# Altium PCB AC-Power-Monitor.PcbDoc (part 2 of 3)
Units mm, origin at the board's own origin, x right, y up, seen from the top; angles counter-clockwise.
Board outline 94 x 57 mm, 4 copper layers (Top Layer, N / GND, L / VCC, Bottom Layer), stack 0.673 mm thick; 70 components, 59 nets, 252 pads, 596 vias.
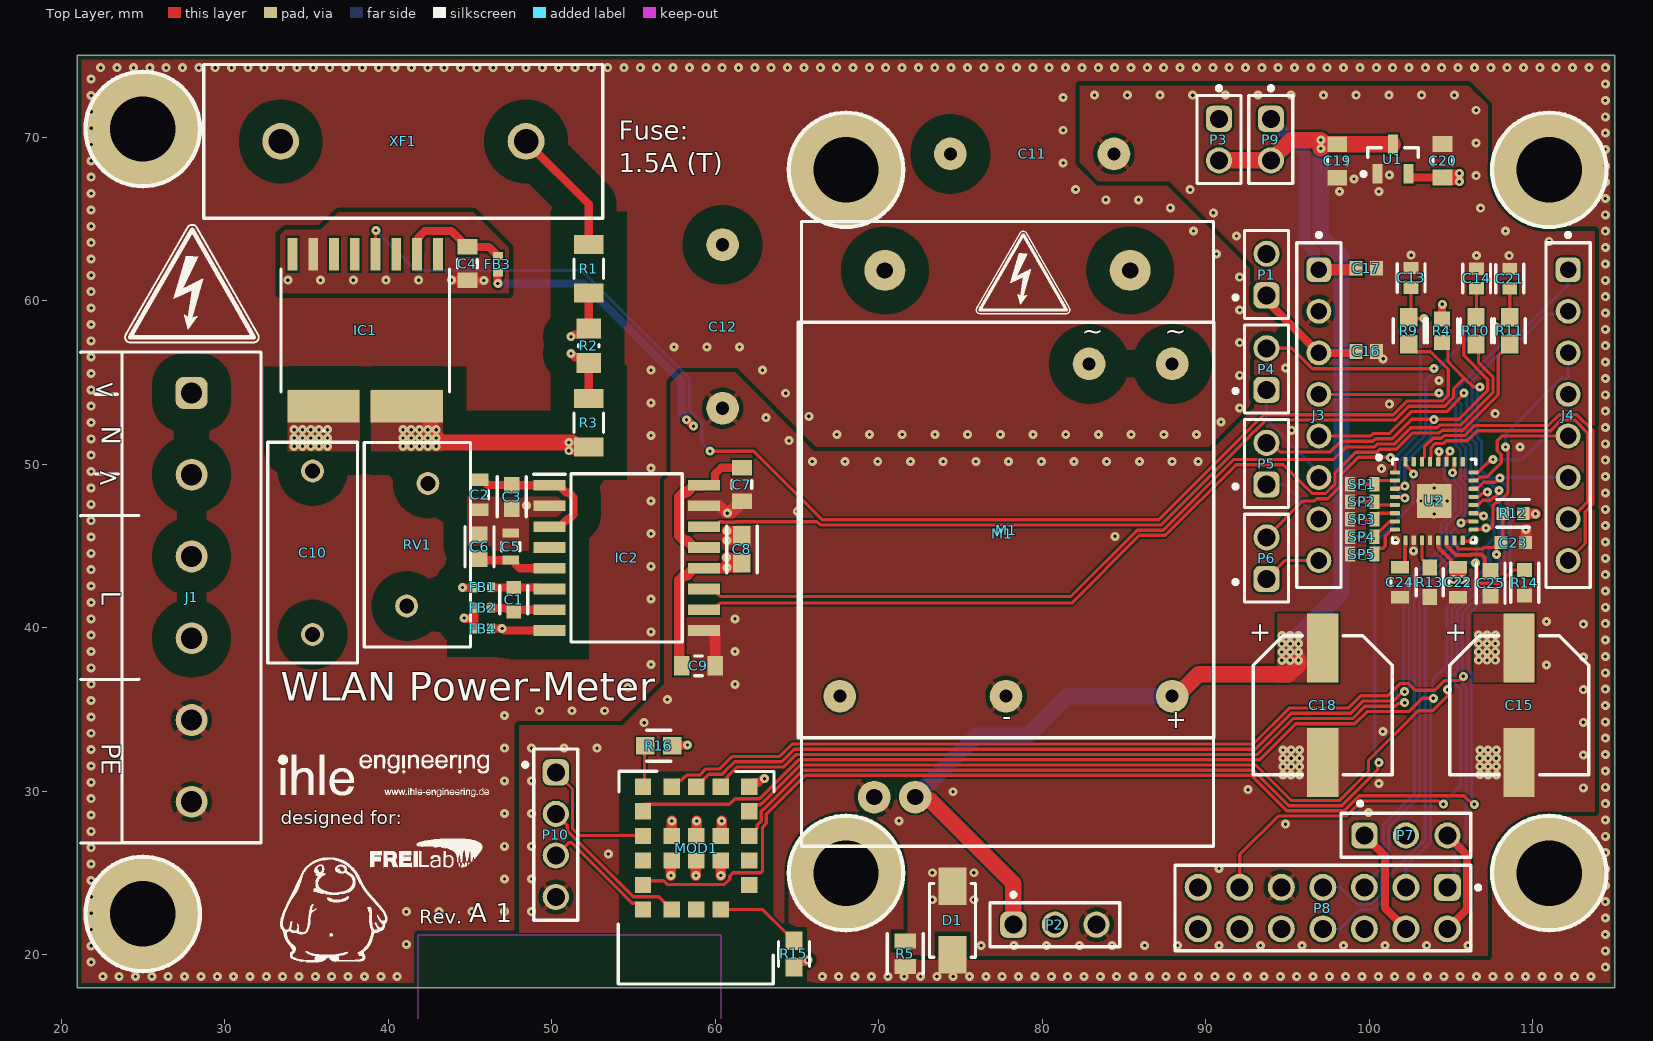
[diagram p0: Top Layer view]

## Via types
v1: diameter 0.55, hole 0.2, Top Layer to Bottom Layer, 445 vias
v2: diameter 0.55, hole 0.2, Top Layer to Bottom Layer, tented both sides, 145 vias
v3: diameter 7, hole 4, Top Layer to Bottom Layer, 6 vias

## Nets (pads, with @x,y where several pads share a name; then routed paths per layer and width w, separated by ;. In a path a pad name is that pad's centre, name@x,y a point inside that pad or via, vN(x,y) a via of type N, cw(c..) or ccw(c..) an arc to the next point about the centre after c; other vN are vias at no path point) (continued)
\RST: (continued)
  Top Layer w0.2: P8.11@92.075,24.13 92.075,26.137 94.422,28.484 98.589,28.484 99.51,29.404 104.232,29.404 104.426,29.21 v1(104.521,29.21) ; U2.15@105.215,45.352 105.24,45.327 105.24,45.08 105.508,44.812 106.915,44.812 107.015,44.912 C23.2@107.741,44.912 ; v1(107.772,44.477) 107.772,44.943 108.164,45.335 R12.1@108.164,46.99
  Bottom Layer w0.2: v1(104.521,29.21) 104.521,29.266 105.583,30.328 105.583,36.227 105.241,36.569 105.241,37.278 105.369,37.406 105.369,41.034 107.947,43.612 107.947,44.207 107.772,44.382 v1(107.772,44.477)
A0N: SP1.2 U2.2 | length 1.4
  Top Layer w0.16: SP1.2@100.318,48.768 100.318,48.802 SP1.2@100.338,48.822
  Top Layer w0.2: SP1.2@100.338,48.822 100.518,49.002 U2.2@101.565,49.002